# Altium PCB Thermostat.PcbDoc
Units mm, origin at the board's own origin, x right, y up, seen from the top; angles counter-clockwise.
Board outline 105.4 x 42.4 mm, 2 copper layers (Top Layer, Bottom Layer); 47 components, 41 nets, 144 pads, 0 vias.
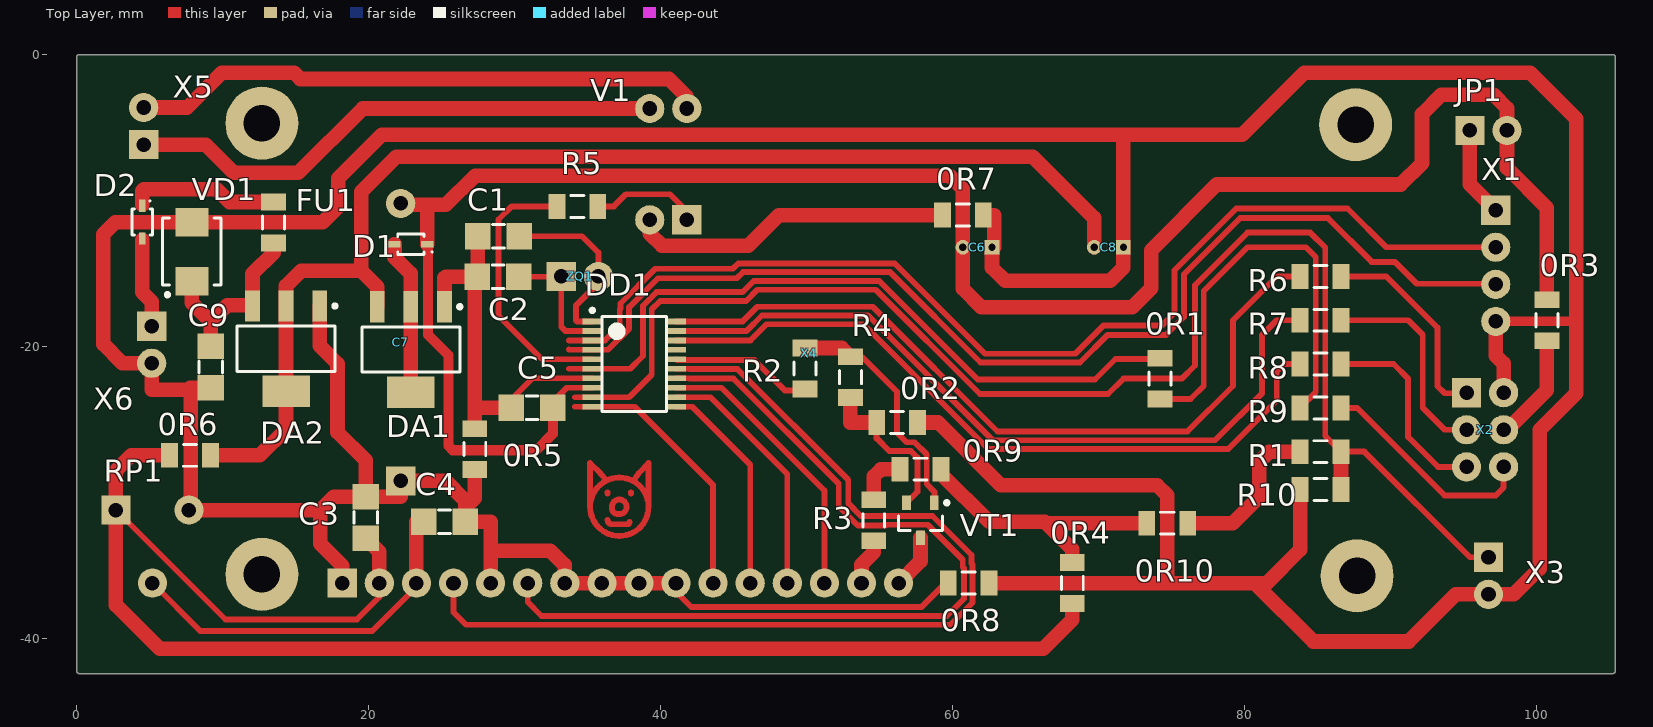
[diagram p0: Top Layer view]
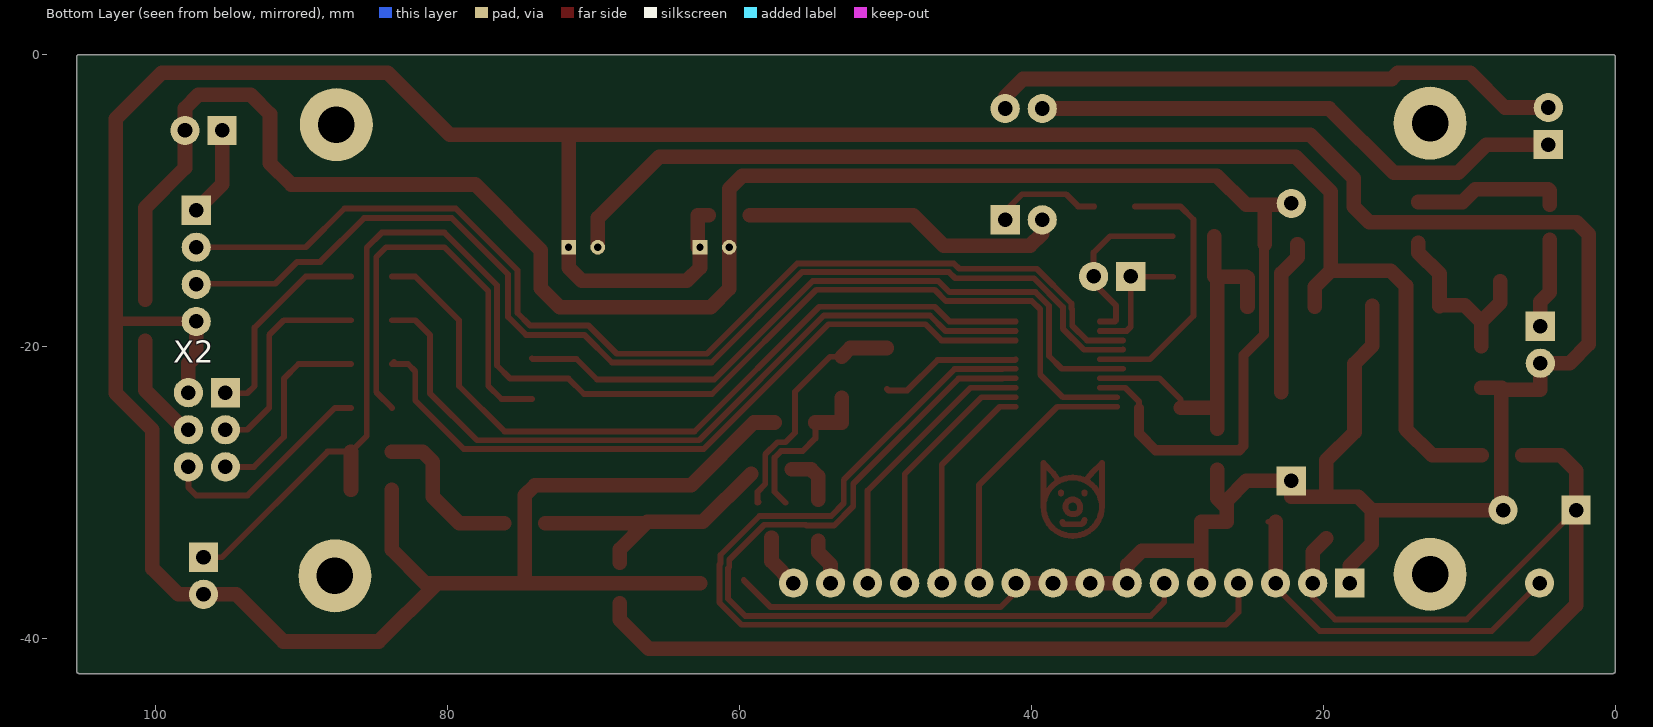
[diagram p1: Bottom Layer view, seen from below]

## Layer stack, top to bottom
Top Solder: solder mask 0.0102, Solder Resist, Dk 3.5
Top Layer: signal copper 0.0356
Dielectric 1: dielectric 0.32, FR-4, Dk 4.8
Bottom Layer: signal copper 0.0356
Bottom Solder: solder mask 0.0102, Solder Resist, Dk 3.5

## Board outline
0.2,-42.4 cw(c0.2,-42.2) 0,-42.2 0,-0.2 cw(c0.2,-0.2) 0.2,0 105.2,0 cw(c105.2,-0.2) 105.4,-0.2 105.4,-42.2 cw(c105.2,-42.2) 105.2,-42.4

## Design rules (kind name [scope] priority, off if disabled: settings)
Clearance [All] p1: gap=0.2
PolygonConnect [All] p1: connectstyle=Relief reliefconductorwidth=0.254 reliefentries=4 polygonreliefangle="90 Angle" airgapwidth=0.254
RoutingVias [All] p1: holewidth=1 width=2 viastyle="Through Hole" minholewidth=0.711 minwidth=1.27 maxholewidth=2.5 maxwidth=5
SolderMaskExpansion [All] p1: expansion=0.102
Width [All] p1: maxlimit=1 minlimit=0.254 preferedwidth=0.4
30 further rules are at their usual default settings.

## Classes and differential pairs
component class Keyboard: SB1 SB2 SB3 SB4 X7
component class Schema: C1 C2 C3 C4 C5 C6 C7 C8 C9 D1 D2 DA1 DA2 DD1 FU1 JP1 R1 R2 R3 R4 R5 R6 R7 R8 R9 R10 RP1 V1 VD1 VT1 X1 X2 X3 X4 X5 X6 ZQ1

## Components (designator, comment, footprint, x,y, rotation, side; value= is the part's Value field where it differs from the comment)
0R1 "" "Resistor SMD 1206" 74.2,-22.2 r270 top
0R2 "" "Resistor SMD 1206" 56.2,-25.2 r180 top
0R3 "" "Resistor SMD 1206" 100.7,-18.2 r270 top
0R4 "" "Resistor SMD 1206" 68.2,-36.2 r90 top
0R5 "" "Resistor SMD 1206" 27.275,-27.025 r90 top
0R6 "" "Resistor SMD 1206" 7.775,-27.45 r0 top
0R7 "" "Resistor SMD 1206" 60.7,-11 r0 top
0R8 "" "Resistor SMD 1206" 61.1,-36.2 r180 top
0R9 "" "Resistor SMD 1206" 57.8,-28.4 r0 top
0R10 "" "Resistor SMD 1206" 74.7,-32.1 r180 top
C1 "Capacitor" "CAPACITOR SMD 1206" 28.9,-12.45 r0 top
C2 "Capacitor" "CAPACITOR SMD 1206" 28.875,-15.225 r0 top
C3 "Capacitor" "CAPACITOR SMD 1206" 19.8,-31.7 r90 top
C4 "Capacitor" "CAPACITOR SMD 1206" 25.2,-32 r180 top
C5 "Capacitor" "CAPACITOR SMD 1206" 31.2,-24.2 r0 top
C6 "Capacitor (Polarized)" BigCapacitor 62.7,-13.2 r180 top
C7 "Ionistor" Ionistor 22.2,-29.2 r90 top locked
C8 "Capacitor (Polarized)" BigCapacitor 71.7,-13.2 r180 top
C9 "Capacitor" "CAPACITOR SMD 1206" 9.2,-21.4 r270 top
D1 "BAT760" SODFL250X110-2N 22.9,-13 r180 top
D2 "BAT760" SODFL250X110-2N 4.5,-11.475 r270 top
DA1 "LM1117" SOT230P700X180-4N 22.9,-20.2 r270 top
DA2 "LM1117" SOT230P700X180-4N 14.35,-20.15 r270 top
DD1 "STM8L051F3P6" TSOP65P640X120-20N 38.2,-21.2 r0 top
FU1 "1A" "Resistor SMD 1206" 13.5,-11.5 r270 top
JP1 "Jumper" Jumper 96.7,-5.2 r0 top
R1 "Resistor (0.05W)" "Resistor SMD 1206" 85.2,-27.2 r0 top
R2 "Resistor (0.05W)" "Resistor SMD 1206" 49.9,-21.5 r270 top
R3 "Resistor (0.05W)" "Resistor SMD 1206" 54.6,-31.9 r90 top
R4 "Resistor (0.05W)" "Resistor SMD 1206" 53,-22.1 r90 top
R5 "Resistor (0.05W)" "Resistor SMD 1206" 34.3,-10.4 r0 top
R6 "Resistor (0.05W)" "Resistor SMD 1206" 85.2,-15.2 r180 top
R7 "Resistor (0.05W)" "Resistor SMD 1206" 85.2,-18.2 r180 top
R8 "Resistor (0.05W)" "Resistor SMD 1206" 85.2,-21.2 r180 top
R9 "Resistor (0.05W)" "Resistor SMD 1206" 85.2,-24.2 r180 top
R10 "Resistor (0.05W)" "Resistor SMD 1206" 85.2,-29.8 r180 top
RP1 "Variable_Resistor" "Var Resistor" 2.7,-31.2 r0 top
V1 "EL817D" PC817 41.8,-11.32 r180 top
VD1 "SMBJ12CA" "SMB Supressor" 7.9,-13.5 r90 top
VT1 "MOSFET" SOT95P245X110-3N 57.8,-31.9 r270 top
X1 "SWIM_Connector" "SWIM Connector" 97.2,-10.66 r270 top
X2 "KBD_Connector" KBD_Connector 95.2,-23.16 r270 top
X3 "OptOutput" Jumper 96.7,-35.7 r270 top
X4 "WH1601" WH1601 18.2,-36.2 r180 top locked
X5 "OptOutput" Jumper 4.6,-4.9 r90 top
X6 "OptOutput" Jumper 5.15,-19.875 r270 top
ZQ1 "Oscillator_small" KX-26 33.2,-15.2 r180 top

## Footprints (in the part's own frame and the unit in brackets; to place one, negate y for a bottom-side part, rotate by r counter-clockwise, add the part's x,y. Pads: shape width x height; smd on the part's side, far side on the other; paste and mask are expansions set on the pad)
BigCapacitor [mm]
  rect 1x1 hole 0.5 unplated: 1(0,0)
  round 1 hole 0.5 unplated: 2(2,0)
  body extent -1.5,2.4 3.5,13.4, height 5.2
"CAPACITOR SMD 1206" [mm]
  rect 1.75x1.8 smd: 1(-1.425,0) 2(1.425,0)
  silkscreen extent -0.4,-0.8 0.4,0.8, body extent -1.7,-0.9 1.7,0.9, height 1.85
Ionistor [mm]
  rect 2x2 hole 1 unplated: 1(0,0)
  round 2 hole 1 unplated: 2(19,0)
  body extent 0,-9.5 19,9.5, height 5
Jumper [mm]
  rect 2x2 hole 1 unplated: 1(-1.27,0)
  round 2 hole 1 unplated: 2(1.27,0)
  body extent -2.54,-1.25 2.54,1.25, height 8.75
KBD_Connector [mm]
  rect 2x2 hole 1 unplated: 1(0,0)
  round 2 hole 1 unplated: 2(2.54,0) 3(5.08,0) 4(0,2.54) 5(2.54,2.54) 6(5.08,2.54)
  body extent -1.27,-1.27 6.35,3.81, height 7.99
KX-26 [mm]
  rect 2x2 hole 1 unplated: 1(0,0)
  round 2 hole 1 unplated: 2(-2.54,0)
  body extent -2.27,-7.02 -0.27,0.12, height 2.5
PC817 [mm]
  rect 2x2 hole 1 unplated: 1(0,0)
  round 2 hole 1 unplated: 2(2.54,0) 3(0,-7.62) 4(2.54,-7.62)
  body extent -1.03,-7.74 3.57,0.13, height 3.75
"Resistor SMD 1206" [mm] "Chip Resistor, 2-Leads, Body 3,10x1,55mm, IPC Medium Density"
  rect 1.15x1.7 smd: 1(-1.4,0) 2(1.4,0)
  silkscreen extent -0.45,-0.75 0.45,0.75, body extent -1.63,-0.85 1.63,0.85, height 0.65
"SMB Supressor" [mm] "SODFL, 2-Leads, Body 3,63x5,35mm, IPC Medium Density"
  rect 1.95x2.25 smd: 1(-2.025,0) 2(2.025,0)
  silkscreen extent -3.07,-2 2.3,2, body extent -2.68,-1.97 2.68,1.97, height 2.45
SODFL250X110-2N [mm] "SODFL, 2-Leads, Body 1,25x2,50mm, IPC Medium Density"
  rect 0.85x0.45 smd: 1(-1.125,0) 2(1.125,0)
  silkscreen extent -1.5,-0.7 0.9,0.7, body extent -1.25,-0.67 1.25,0.68, height 1.1
SOT95P245X110-3N [mm] "SOT23, 3-Leads, Body 2,90x2,45mm, Pitch 0,95mm, IPC Medium Density"
  rect 1x0.6 smd: 1(-1.2,0.95) 2(-1.2,-0.95) 3(1.2,0)
  silkscreen extent -1.32,-1.5 0.7,1.93, body extent -1.3,-1.5 1.3,1.5, height 1.1
SOT230P700X180-4N [mm] "SOT223, 4-Leads, Body 6,50x7,00mm (avg), Pitch 2,30mm, IPC Medium Density"
  rect 2.15x1 smd: 1(-2.925,2.3) 2(-2.925,0) 3(-2.925,-2.3)
  rect 2.15x3.25 smd: 4(2.925,0)
  silkscreen extent -3.05,-3.35 1.55,3.48, body extent -3.5,-3.35 3.5,3.35, height 1.8
"SWIM Connector" [mm]
  rect 2x2 hole 1 unplated: 1(0,0)
  round 2 hole 1 unplated: 2(2.54,0) 3(5.08,0) 4(7.62,0)
  body extent -1.27,-1.27 8.89,1.27, height 8.99
TSOP65P640X120-20N [mm] "TSOP, 20-Leads, Body 6,50x4,40mm, Pitch 0,65mm, IPC Medium Density"
  rect 1.35x0.4 smd: 1(-2.875,2.925) 2(-2.875,2.275) 3(-2.875,1.625) 4(-2.875,0.975) 5(-2.875,0.325) 6(-2.875,-0.325) 7(-2.875,-0.975) 8(-2.875,-1.625) 9(-2.875,-2.275) 10(-2.875,-2.925) 11(2.875,-2.925) 12(2.875,-2.275) 13(2.875,-1.625) 14(2.875,-0.975) 15(2.875,-0.325) 16(2.875,0.325) 17(2.875,0.975) 18(2.875,1.625) 19(2.875,2.275) 20(2.875,2.925)
  silkscreen extent -3,-3.25 2.2,3.8, body extent -3.2,-3.3 3.2,3.3, height 1.2
"Var Resistor" [mm]
  rect 2x2 hole 1 unplated: 1(0,0)
  round 2 hole 1 unplated: 2(5,0) 3(2.5,-5)
  body extent -0.75,-5.88 5.75,1.17, height 7.5
WH1601 [mm]
  rect 2x2 hole 1 unplated: 1(0,0)
  round 2 hole 1 unplated: 2(-2.54,0) 3(-5.08,0) 4(-7.62,0) 5(-10.16,0) 6(-12.7,0) 7(-15.24,0) 8(-17.78,0) 9(-20.32,0) 10(-22.86,0) 11(-25.4,0) 12(-27.94,0) 13(-30.48,0) 14(-33.02,0) 15(-35.56,0) 16(-38.1,0)
  round 5 hole 2.5 unplated: 17(-69.5,-0.5) 18(-69.4,-31.4) 19(5.5,-31.5) 20(5.5,-0.6)
  body extent -72,-34 8,2, height 7.99

## Part data
D1 D2: library part Diode
DD1: library part "STM8L051F3P6 (TSSOP-20)"
FU1: library part Fuse
V1: library part Optocoupler
VD1: library part Supressor

## Nets (pads, with @x,y where several pads share a name; then routed paths per layer and width w, separated by ;. In a path a pad name is that pad's centre, name@x,y a point inside that pad or via, vN(x,y) a via of type N, cw(c..) or ccw(c..) an arc to the next point about the centre after c; other vN are vias at no path point)
+5V: 0R4.1 0R4.2 0R6.1 0R6.2 0R9.1 0R9.2 0R10.1 0R10.2 C3.1 C8.2 DA1.3 DA2.2 DA2.4 R1.1 R3.2 RP1.1 X4.2 | length 226.8
  Top Layer w0.4: RP1.1 10.2,-38.7 19.2,-38.7 20.74,-37.16 X4.2 ; 0R9.2@59.2,-28.7 0R9.2 ; 66.3,-32 66.4,-32.1
  Top Layer w1: 0R6.1 3.75,-27.45 2.7,-28.5 RP1.1 2.7,-37.7 5.7,-40.7 66.2,-40.7 68.2,-38.7 0R4.1 ; 0R6.2 12.55,-27.45 14.35,-25.65 DA2.4 DA2.2 14.35,-15.85 15.4,-14.8 19.5,-14.8 ; C3.1 20.74,-34.065 X4.2 ; DA1.3 20.6,-15.9 19.5,-14.8 ; R3.2 54.6,-28.9 55.1,-28.4 0R9.1 ; 0R9.2@59.2,-28.7 62.5,-32 66.3,-32 ; 0R4.2 68.2,-33.9 66.4,-32.1 0R10.2 ; C8.2 69.7,-11.2 65.5,-7 21.9,-7 19.5,-9.4 19.5,-14.8 ; 0R10.1 79.2,-32.1 81,-30.3 81,-27.9 81.7,-27.2 R1.1
GND: 0R2.1 0R2.2 0R5.1 0R5.2 0R7.1 0R7.2 0R8.1 0R8.2 C1.1 C2.1 C3.2 C4.1 C5.1 C6.1 C7.1 C8.1 C9.2 DA1.1 DA2.1 DD1.7 R4.1 R10.2 RP1.2 V1.2 VD1.2 VT1.2 X1.4 X2.4 X3.2 X4.1 X4.5 X4.7 X4.8 X4.9 X4.10 X6.2 | length 422
  Top Layer w0.4: RP1.2 RP1.2@7.825,-31.075 ; 7.8,-22.825 7.825,-22.85 ; 7.825,-22.95 9.075,-22.95 C9.2 ; 22.2,-30.275 C7.1 ; 25.2,-15.3 25.275,-15.225 ; 27.275,-24.25 27.325,-24.2 ; C2.1@27.275,-15.4 C2.1 C2.1@27.475,-15.2 ; 28.36,-34.015 28.4,-33.975 ; C5.1 29.775,-23.625 31.225,-22.175 DD1.7 ; X4.10 41.06,-36.785 42.125,-37.85 57.85,-37.85 0R8.2@59.7,-36 ; 0R2.2 54.8,-26.291 55.659,-27.15 57.141,-27.15 57.6,-27.609 57.6,-29.95 VT1.2 ; 0R8.1@62.5,-36 0R8.1@62.7,-36.2 ; C6.1 C6.1@62.85,-13.2 ; 71.625,-5.5 71.7,-5.575 ; 102.62,-18.28 102.7,-18.2
  Top Layer w0.65: X1.4 102.62,-18.28
  Top Layer w1: RP1.2 16.7,-31.2 ; 7.8,-22.825 C9.2 ; RP1.2@7.825,-31.075 7.825,-22.95 ; 7.825,-22.85 7.825,-22.95 ; DA2.1 16.65,-19.95 17.875,-21.175 17.875,-25.875 19.8,-27.8 C3.2 ; X4.1 18.2,-35 16.7,-33.5 16.7,-31.2 ; 22.2,-30.275 C3.2 ; C7.1 25.275,-29.2 26.625,-30.55 26.625,-31.025 ; DA1.1 25.2,-15.3 ; 25.275,-15.225 C2.1 ; 0R5.1 27.275,-30.375 26.625,-31.025 ; 0R5.2 27.275,-24.25 C2.1@27.275,-15.4 ; 27.325,-24.2 C5.1 ; C2.1@27.475,-15.2 C1.1 ; X4.5 28.36,-34.015 28.36,-32 C4.1 26.625,-31.025 ; 28.4,-33.975 32.45,-33.975 33.44,-34.965 X4.7 X4.8 X4.9 X4.10 ; V1.2 39.26,-12.26 40.1,-13.1 46,-13.1 48.1,-11 0R7.1 ; R4.1 53,-25.2 0R2.2 ; 0R2.1 59,-25.2 63.3,-29.5 74,-29.5 74.7,-30.2 74.7,-36.2 ; 0R7.2 62.85,-11 C6.1@62.85,-13.2 ; 0R8.1@62.7,-36.2 74.7,-36.2 ; C6.1 62.7,-14.6 63.6,-15.5 70.8,-15.5 71.7,-14.6 C8.1 71.7,-5.575 ; R10.2 83.8,-33.9 81.5,-36.2 80.7,-36.2 ; X1.4 97.2,-20.625 97.74,-21.165 X2.4 ; 7.825,-22.95 5.15,-22.95 X6.2 3.145,-21.145 1.825,-19.825 1.825,-12.3 2.65,-11.475 VD1.2 16.875,-11.475 17.925,-10.425 17.925,-8.475 20.9,-5.5 71.625,-5.5 79.85,-5.5 84.1,-1.25 99.55,-1.25 102.7,-4.4 102.7,-18.2 102.7,-23.2 100.2,-25.7 100.2,-35.2 98.43,-36.97 X3.2 94.47,-36.97 91.24,-40.2 84.7,-40.2 80.7,-36.2 ; 16.7,-31.2 17.625,-30.275 C3.2 ; 74.7,-36.2 80.7,-36.2
NetC1_2: C1.2 DD1.1 ZQ1.2 | length 12.3
  Top Layer w0.4: C1.2 34.625,-12.45 35.74,-13.565 ZQ1.2 35.74,-15.66 34.2,-17.2 34.2,-18.2 34.275,-18.275 DD1.1
NetC2_2: C2.2 DD1.2 ZQ1.1 | length 8.6
  Top Layer w0.4: C2.2 33.175,-15.225 ZQ1.1 33.2,-18.65 33.475,-18.925 DD1.2
NetC4_2: C4.2 RP1.3 X4.3 | length 25.6
  Top Layer w0.4: RP1.3 8.475,-39.475 20.25,-39.475 23.28,-36.445 X4.3 ; C4.2@23.28,-32 C4.2
  Top Layer w1: X4.3 C4.2@23.28,-32
NetC9_1: C9.1 DA2.3 FU1.2 VD1.1 | length 13.3
  Top Layer w0.4: DA2.3@12,-17.175 DA2.3
  Top Layer w1: VD1.1 7.9,-17 9.2,-18.3 ; C9.1 9.2,-18.3 ; DA2.3@12,-17.175 10.325,-17.175 9.2,-18.3 ; DA2.3 12.05,-15.025 13.5,-13.575 FU1.2
NetD1_1: D1.2 DA1.2 DA1.4 | length 10.6
  Top Layer w1: D1.2 21.775,-13.875 22.9,-15 DA1.2 DA1.4
NetD2_1: D2.2 X6.1 | length 6.2
  Top Layer w1: D2.2@4.5,-12.675 4.5,-16.275 5.15,-16.925 X6.1
NetD2_2: D2.1 FU1.1 | length 10.4
  Top Layer w1: D2.1@4.5,-10.275 4.5,-9.325 4.6,-9.225 9.6,-9.225 10.475,-10.1 FU1.1
NetDD1_3: DD1.3 X1.2 | length 76
  Top Layer w0.4: 33.725,-19.575 DD1.3 36.2,-19.575 37.2,-18.575 37.2,-17.45 37.25,-17.4 37.25,-17.054 39.629,-14.675 44.95,-14.675 45.319,-14.306 56.042,-14.306 62.227,-20.49 68.41,-20.49 70.35,-18.55 74.35,-18.55 75.2,-17.7 75.2,-14.781 79.431,-10.55 87.05,-10.55 89.7,-13.2 X1.2
NetDD1_4: DD1.4 X1.3 | length 76.8
  Top Layer w0.4: 33.725,-20.2 33.75,-20.225 DD1.4 36.399,-20.225 37.85,-18.774 37.85,-17.303 39.828,-15.325 45.219,-15.325 45.639,-14.906 55.723,-14.906 61.907,-21.09 68.729,-21.09 70.619,-19.2 74.619,-19.2 75.85,-17.969 75.85,-15.05 79.7,-11.2 85.7,-11.2 88.7,-14.2 90.281,-14.2 91.781,-15.7 97.16,-15.7 X1.3
NetDD1_5: DD1.5 R5.1 | length 18.6
  Top Layer w0.4: R5.1 29.8,-10.4 28.9,-11.3 28.9,-17.9 31.875,-20.875 DD1.5
NetDD1_6: 0R1.1 0R1.2 DD1.6 R9.2 | length 78.2
  Top Layer w0.4: 33.725,-21.525 DD1.6 37.925,-21.525 38.8,-20.65 38.8,-17.201 39.726,-16.275 45.613,-16.275 46.382,-15.506 54.979,-15.506 61.724,-22.25 69.75,-22.25 71.15,-20.85 74.15,-20.85 0R1.1 ; 0R1.2 76.3,-23.6 77.2,-22.7 77.2,-16.2 80.2,-13.2 84.2,-13.2 84.875,-13.875 84.875,-23.125 R9.2
NetDD1_9: DD1.9 R1.2 R10.1 X3.1 | length 98.3
  Top Layer w0.4: 34.15,-23.475 DD1.9 37.85,-23.475 39.4,-21.925 39.4,-17.45 39.975,-16.875 45.861,-16.875 46.631,-16.106 54.731,-16.106 61.875,-23.25 70.65,-23.25 71.7,-22.2 75.7,-22.2 76.6,-21.3 76.6,-15.8 80.2,-12.2 84.5,-12.2 85.525,-13.225 85.525,-26.125 R1.2 88.2,-27.2 95.43,-34.43 X3.1
  Top Layer w1: R10.1 R1.2
NetDD1_10: DD1.10 X4.11 | length 18.4
  Top Layer w0.4: 34.125,-24.125 DD1.10 38.225,-24.125 43.6,-29.5 X4.11
NetDD1_11: DD1.11 X4.12 | length 14.8
  Top Layer w0.4: DD1.11 42.175,-24.125 46.14,-28.09 X4.12
NetDD1_12: DD1.12 X4.13 | length 17.3
  Top Layer w0.4: DD1.12 43.425,-23.475 48.68,-28.73 X4.13
NetDD1_13: DD1.13 X4.14 | length 19.4
  Top Layer w0.4: DD1.13 44.175,-22.825 51.22,-29.87 X4.14
NetDD1_14: DD1.14 X4.6 | length 60.5
  Top Layer w0.4: X4.6 30.9,-37.5 31.85,-38.45 59.601,-38.45 60.775,-37.276 60.775,-35.184 60.7,-35.109 60.7,-34.6 58.3,-32.2 55.45,-32.2 55.4,-32.25 53.511,-32.25 52.2,-30.939 52.2,-29.4 45,-22.2 41.975,-22.2 41.95,-22.175 DD1.14
NetDD1_15: DD1.15 X4.4 | length 68.3
  Top Layer w0.4: X4.4 25.82,-38.195 26.675,-39.05 59.85,-39.05 61.375,-37.525 61.375,-34.936 61.3,-34.861 61.3,-34.281 58.619,-31.6 53.709,-31.6 52.85,-30.741 52.85,-29.131 45.269,-21.55 41.975,-21.55 41.95,-21.525 DD1.15
NetDD1_16: DD1.16 R2.2 | length 9.7
  Top Layer w0.4: DD1.16 41.125,-20.925 46.425,-20.925 48.5,-23 49.8,-23 R2.2
NetDD1_18: DD1.18 R8.2 | length 50.5
  Top Layer w0.4: DD1.18 46.163,-19.575 47.26,-18.479 53.898,-18.479 62.44,-27.021 78.879,-27.021 82.2,-23.7 82.2,-21.7 82.7,-21.2 R8.2 R8.2@83.656,-21.056
NetDD1_19: DD1.19 R7.2 | length 52.4
  Top Layer w0.4: DD1.19 45.894,-18.925 46.94,-17.879 54.217,-17.879 62.76,-26.421 77.979,-26.421 81.2,-23.2 81.2,-19.2 82.2,-18.2 R7.2
NetDD1_20: DD1.20 R6.2 | length 53.7
  Top Layer w0.4: DD1.20 45.625,-18.275 46.621,-17.279 54.537,-17.279 63.079,-25.821 76.079,-25.821 79.2,-22.7 79.2,-18.2 82.2,-15.2 R6.2
NetJP1_1: JP1.1 X1.1 | length 6.2
  Top Layer w1: JP1.1 95.43,-8.89 X1.1
NetR2_1: R2.1 R4.2 VT1.1 | length 16.6
  Top Layer w0.4: R4.2 53.8,-20.7 56.2,-23.1 56.2,-25.9 56.85,-26.55 57.389,-26.55 58.225,-27.386 58.225,-29.416 58.75,-29.941 VT1.1 VT1.1@58.7,-30.65
  Top Layer w1: R2.1 52.4,-20.1 R4.2
NetR3_1: R3.1 X4.15 | length 3.2
  Top Layer w1: X4.15 53.76,-34.94 54.6,-34.1 R3.1
NetR5_2: R5.2 V1.1 | length 7.5
  Top Layer w0.4: R5.2 36.8,-10.4 37.625,-9.575 40.65,-9.575 41.8,-10.725 V1.1
NetR6_1: R6.1 X2.1 | length 14.3
  Top Layer w0.4: R6.1 89.7,-15.2 93.2,-18.7 93.2,-22.7 93.7,-23.2 95.16,-23.2 X2.1
NetR7_1: R7.1 X2.2 | length 14.6
  Top Layer w0.4: R7.1 91.2,-18.2 92.2,-19.2 92.2,-24.2 93.7,-25.7 X2.2
NetR8_1: R8.1 X2.3 | length 13.9
  Top Layer w0.4: R8.1 90.2,-21.2 91.2,-22.2 91.2,-26.2 93.24,-28.24 X2.3
NetR9_1: R9.1 X2.6 | length 15.3
  Top Layer w0.4: R9.1 87.7,-24.2 93.7,-30.2 97.2,-30.2 97.74,-29.66 X2.6
NetSB1_1: 
NetSB1_2: 
NetSB2_1: 
NetSB3_1: 
NetSB4_1: 
NetV1_3: V1.3 X5.2 | length 39.7
  Top Layer w0.4: V1.3 V1.3@41.8,-2.9
  Top Layer w1: X5.2 7.57,-3.63 9.95,-1.25 14.9,-1.25 15.325,-1.675 40.575,-1.675 V1.3@41.8,-2.9
NetV1_4: V1.4 X5.1 | length 37.3
  Top Layer w1: X5.1 8.845,-6.17 10.775,-8.1 15.2,-8.1 19.6,-3.7 V1.4
NetVT1_3: VT1.3 X4.16 | length 3.7
  Top Layer w1: X4.16 57.8,-34.7 VT1.3
VDD: 0R3.1 0R3.2 C5.2 C6.2 C7.2 D1.1 DD1.8 JP1.2 X2.5 | length 146.2
  Top Layer w0.4: C7.2 C7.2@22.3,-10.3 ; 24,-10.3 24.025,-10.325 ; D1.1 D1.1@24.075,-13.05 ; C5.2 32.625,-23.775 33.575,-22.825 DD1.8 ; X2.5 X2.5@98,-25.7
  Top Layer w0.7: D1.1@24.075,-13.05 24.075,-19.2 25.475,-20.6 25.475,-26.8 25.775,-27.1 31.5,-27.1 32.625,-25.975 C5.2
  Top Layer w1: C7.2@22.3,-10.3 24,-10.3 25.3,-10.3 27.3,-8.3 59.8,-8.3 60.7,-9.2 C6.2 60.7,-16.025 61.975,-17.3 72.3,-17.3 73.6,-16 73.6,-13.4 78.1,-8.9 90.7,-8.9 92.15,-7.45 92.15,-4.075 93.475,-2.75 97.05,-2.75 97.97,-3.67 JP1.2 97.97,-7.77 100.7,-10.5 0R3.1 ; D1.1 24.025,-10.325 ; X2.5@98,-25.7 100.7,-23 0R3.2
pads on no net: DD1.17 X4.17 X4.18 X4.19 X4.20
copper on no net: | length 26.9
  Top Layer w0.4: 36.3,-29.175 35.884,-28.684 35.175,-27.975 35.175,-30.975 ; 36.375,-31.875 ccw(c36.675,-31.875) 36.675,-32.175 37.704,-32.175 ccw(c37.704,-32.011) 37.868,-32.011 ; 36.375,-30.075 36.375,-29.975 ; 36.675,-31.075 ccw(c37.075,-31.075) 37.075,-31.475 37.175,-31.475 ccw(c37.175,-30.975) 37.675,-30.975 ccw(c37.175,-30.975) 37.175,-30.475 ccw(c37.175,-30.975) 36.675,-30.975 ; 37.975,-30.075 37.975,-29.975 ; 38.125,-29.2 38.486,-28.704 39.175,-27.975 39.175,-30.975 ; 35.175,-30.975 cw(c37.175,-30.975) 37.175,-28.975 cw(c37.175,-30.975) 39.175,-30.975 ; 35.175,-30.975 ccw(c37.175,-30.975) 37.175,-32.975 ccw(c37.175,-30.975) 39.175,-30.975